# Altium PCB CR00041.PcbDoc
Units mm, origin at the board's own origin, x right, y up, seen from the top; angles counter-clockwise.
Board outline 18 x 19 mm, 2 copper layers (L 01 (Top), L 02), stack 1.506 mm thick; 14 components, 44 nets, 102 pads, 30 vias.
Unrouted connection lines stored in the file: 1.
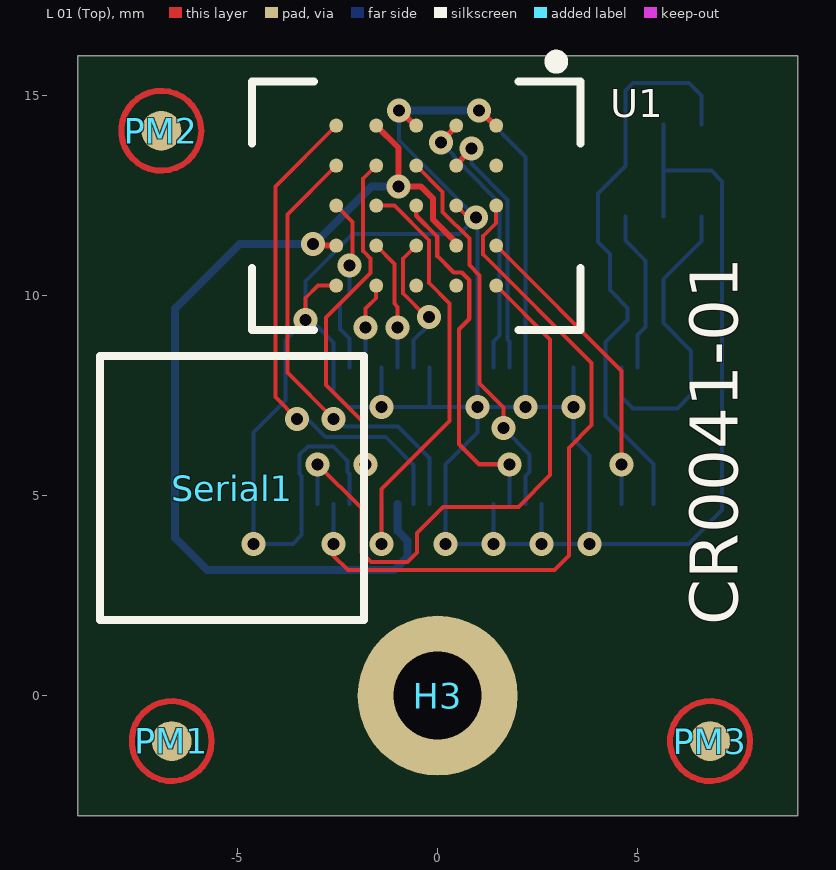
[diagram p0: L 01 (Top) view]
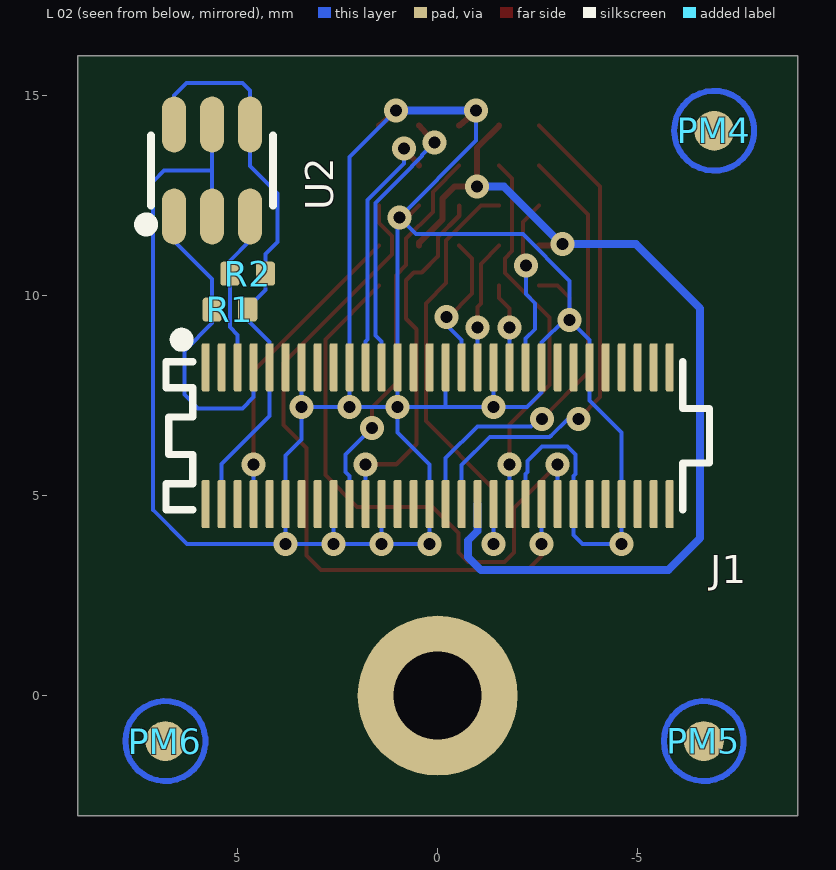
[diagram p1: L 02 view, seen from below]

## Layer stack, top to bottom
Top Solder: solder mask 0.0102, Solder Resist, Dk 3.5
L 01 (Top): signal copper 0.053
Dielectric1: core 1.4, FR-4, Dk 4.2
L 02: signal copper 0.053
Bottom Solder: solder mask 0.0102, Solder Resist, Dk 3.5

## Board outline
-9,-3 -9,16 9,16 9,-3

## Design rules (kind name [scope] priority, off if disabled: settings)
BoardOutlineClearance [All] p1: gap=0 except(0.5: Arc-OutlineEdge Track-OutlineEdge SMDPad-OutlineEdge THPad-OutlineEdge Via-OutlineEdge Fill-OutlineEdge Poly-OutlineEdge Region-OutlineEdge)
Clearance "HV Clearance" [(InNetClass('HV') AND InPolygon)] p1: gap=0.3
Clearance Clearance_ToUnplatedHole [IsPad and ( (HoleSize = 1.5) or (HoleSize = 3.25) ) vs (IsVia or IsTrack OR InPoly)] p2: gap=0.2
Clearance Clearance_DiffPair [(InDifferentialPairClass('All Differential Pairs')) vs (InPolygon)] p3: gap=0.3
Clearance Clearance_PolyToPoly [(InPolygon) vs InNamedPolygon('L01_U1_IN') or    InNamedPolygon('L01_U1_OUT') or InNamedPolygon('L01_U1_PGND')   or InNamedPolygon('L01_U2_IN') or    InNamedPolygon('L01_U2_OUT') or InNamedPolygon('L01_U2_PGND')] p4: gap=0.2
Clearance Clearance_Polygon [(InPolygon)] p5: gap=0.2 except(0.7: Poly-Poly)
Clearance [All] p6: gap=0.125 except(0.1: Track-Track Track-SMDPad Track-Via SMDPad-Via)
ComponentClearance ComponentClearance_logo [(HasFootprint('LOGO PRINT') or HasFootprint('FIDU-DOT - small'))] p1: gap=-0.05 collisioncheckmode=3 verticalgap=-0.1 showdistances=FALSE
ComponentClearance [All] p2: gap=-0.05 collisioncheckmode=3 verticalgap=0.254 showdistances=FALSE
DiffPairsRouting DiffPairsRouting_Under_FPGA [TouchesRoom('Room_MAX10')and InNetClass('Diff_IO')] p1: maxlimit=0.16 minlimit=0.16 mostfreqgap=0.16 toplayer_minwidth=0.1 toplayer_maxwidth=0.11 toplayer_prefwidth=0.11 bottomlayer_minwidth=0.1 bottomlayer_maxwidth=0.11 bottomlayer_prefwidth=0.11 maxuncoupledlength=15
DiffPairsRouting [InNetClass('Diff_IO') and not TouchesRoom('Room_MAX10')] p2: maxlimit=0.16 minlimit=0.16 mostfreqgap=0.16 toplayer_minwidth=0.11 toplayer_maxwidth=0.11 toplayer_prefwidth=0.11 bottomlayer_minwidth=0.11 bottomlayer_maxwidth=0.11 bottomlayer_prefwidth=0.11 maxuncoupledlength=2
FabricationTestPointUsage TestPointUsage [All] p1: valid=0 allowmultiple=FALSE
FabricationTestpoint Testpoint [All] p1: side=3 testpointundercomponent=TRUE minsize=1.016 maxsize=2.54 preferedsize=1.524 minholesize=0 maxholesize=1.016 preferedholesize=0.813 testpointgrid=0.025 allowsidetop=TRUE allowsidebottom=TRUE usegrid=TRUE gridtolerance=0
HoleSize [All] p1: absolutevalues=TRUE maxlimit=5 minlimit=0.2 maxpercent=80.000 minpercent=20.000
MinimumAnnularRing [All] p1: minimumring=0.15
MinimumSolderMaskSliver [All] p1: minsoldermaskwidth=0.1
PlaneClearance [All] p1: clearance=0.4
PlaneConnect [All] p1: planeconnectstyle=Direct reliefexpansion=0.508 reliefentries=4 reliefconductorwidth=0.254 reliefairgap=0.254
PolygonConnect PolygonConnect_6 [All vs IsNamedPolygon('L01_U1_PGND')] p1: connectstyle=Direct reliefconductorwidth=0.254 reliefentries=4 polygonreliefangle="90 Angle" airgapwidth=0.254
PolygonConnect PolygonConnect_7 [All vs IsNamedPolygon('L01_U1_IN')] p2: connectstyle=Direct reliefconductorwidth=0.254 reliefentries=4 polygonreliefangle="90 Angle" airgapwidth=0.254
PolygonConnect PolygonConnect_8 [All vs IsNamedPolygon('L01_U1_OUT')] p3: connectstyle=Direct reliefconductorwidth=0.254 reliefentries=4 polygonreliefangle="90 Angle" airgapwidth=0.254
PolygonConnect [All] p4: connectstyle=Direct reliefconductorwidth=0.254 reliefentries=4 polygonreliefangle="90 Angle" airgapwidth=0.254
RoutingCorners [All] p1: cornerstyle=Round minsetback=2 maxsetback=2
RoutingVias [All] p1: holewidth=0.3 width=0.6 viastyle="Through Hole" minholewidth=0.2 minwidth=0.5 maxholewidth=1 maxwidth=3
SMDNeckDown SMDNeckDown_Current_R [(InComponent('R22') or ( InComponent('R28'))) and IsPad] p1: percent=105.000
SMDNeckDown [isPad] p2: percent=80.000
SilkToSilkClearance [All] p1: silktosilkclearance=0.025
SilkToSolderMaskClearance SilkscreenOverComponentPads [IsPad] p1: minsilkscreentomaskgap=0.01 clearancetoexposedcopper=TRUE
SolderMaskExpansion SolderMaskExpansion_VIA [(IsVia)] p1: expansion=-0.15
SolderMaskExpansion [All] p2: expansion=0
Width [All] p1: maxlimit=3 minlimit=0.1 preferedwidth=0.1 minimp=50.000000 maximp=50.000000 favimp=50.000000 checkconnectedcopper=TRUE
19 further rules are at their usual default settings.

## Classes and differential pairs
component class CR00041: PM1 PM2 PM3 PM4 PM5 PM6 Serial1
component class CRUVI: H3 J1 R1 R2 SNAP1 U1 U2
differential pair CLK: +CLK_P -CLK_N

## Components (designator, comment, footprint, x,y, rotation, side; value= is the part's Value field where it differs from the comment)
H3 "Mount.Hole 2mm" MHole2_2mm 0,0 r0 top locked
J1 "ST4-30-1.50-L-D-P-TR" ST4-30-1_50-L-D 0,6.5 r180 bottom locked
PM1 "FIDU-DOT - small" "FIDU-DOT - small" -6.652,-1.135 r0 top
PM2 "FIDU-DOT - small" "FIDU-DOT - small" -6.911,14.124 r0 top
PM3 "FIDU-DOT - small" "FIDU-DOT - small" 6.808,-1.135 r90 top
PM4 "FIDU-DOT - small" "FIDU-DOT - small" -6.911,14.124 r180 bottom
PM5 "FIDU-DOT - small" "FIDU-DOT - small" -6.652,-1.135 r180 bottom
PM6 "FIDU-DOT - small" "FIDU-DOT - small" 6.808,-1.135 r90 bottom
R1 "4K7" RESC1005X40N 5.195,9.653 r0 bottom
R2 "4K7" RESC1005X40N 4.75,10.55 r0 bottom
Serial1 "Serialnumber 6,3 x 6.3mm" Serial_6.3x6.3mm -5.14,5.192 r0 top
SNAP1 "SNAP CRUVI 3x" CRUVI_3X_SNAP 22.86,25 r0 top locked
U1 "S26KS512SDPBHI00x" BGA25C100P5X5_800X600X120N -0.537,12.251 r270 top locked
U2 "24AA025E48T-I/OT" SOT95P280X145-6N 5.641,13.132 r90 bottom

## Footprints (in the part's own frame and the unit in brackets; to place one, negate y for a bottom-side part, rotate by r counter-clockwise, add the part's x,y. Pads: shape width x height; smd on the part's side, far side on the other; paste and mask are expansions set on the pad)
BGA25C100P5X5_800X600X120N [mm]
  round 0.35 smd: A1(-2,2) A2(-1,2) A3(0,2) A4(1,2) A5(2,2) B1(-2,1) B2(-1,1) B3(0,1) B4(1,1) B5(2,1) C1(-2,0) C2(-1,0) C3(0,0) C4(1,0) C5(2,0) D1(-2,-1) D2(-1,-1) D3(0,-1) D4(1,-1) D5(2,-1) E1(-2,-2) E2(-1,-2) E3(0,-2) E4(1,-2) E5(2,-2)
  silkscreen extent -3.75,-4.11 3.11,4.11, body extent -3.05,-4.05 3.05,4.05, height 1.21
CRUVI_3X_SNAP [mm]
"FIDU-DOT - small" [mm]
  round 1 smd paste-1: 0(0,0)
  L 01 (Top) circle w0.15: c0,0 r1
MHole2_2mm [mm]
  round 4 hole 2.2: 1(0,0)
RESC1005X40N [mm] "Vishay D0402 1 x 0.5mm (+/- 0.05), 0.2mm +/-0.1mm Kontakte"
  rrect33% 0.48x0.6 smd: 1(-0.445,0) 2(0.445,0)
  body extent -0.5,-0.25 0.5,0.25, height 0.35
Serial_6.3x6.3mm [mm]
  silkscreen extent -3.3,-3.3 3.3,3.3, body extent -3,-3 3,3, height 0.21
SOT95P280X145-6N [mm]
  oval 1.4x0.6 smd: 1(-1.15,0.95) 2(-1.15,0) 3(-1.15,-0.95) 4(1.15,-0.95) 5(1.15,0) 6(1.15,0.95)
  silkscreen extent -1.5,-1.53 0.87,1.8, body extent -1.35,-1.45 1.35,1.45, height 1.45
ST4-30-1_50-L-D [mm]
  rrect33% 0.2x1.2 smd: 1(-5.8,1.71) 2(-5.8,-1.71) 3(-5.4,1.71) 4(-5.4,-1.71) 5(-5,1.71) 6(-5,-1.71) 7(-4.6,1.71) 8(-4.6,-1.71) 9(-4.2,1.71) 10(-4.2,-1.71) 11(-3.8,1.71) 12(-3.8,-1.71) 13(-3.4,1.71) 14(-3.4,-1.71) 15(-3,1.71) 16(-3,-1.71) 17(-2.6,1.71) 18(-2.6,-1.71) 19(-2.2,1.71) 20(-2.2,-1.71) 21(-1.8,1.71) 22(-1.8,-1.71) 23(-1.4,1.71) 24(-1.4,-1.71) 25(-1,1.71) 26(-1,-1.71) 27(-0.6,1.71) 28(-0.6,-1.71) 29(-0.2,1.71) 30(-0.2,-1.71) 31(0.2,1.71) 32(0.2,-1.71) 33(0.6,1.71) 34(0.6,-1.71) 35(1,1.71) 36(1,-1.71) 37(1.4,1.71) 38(1.4,-1.71) 39(1.8,1.71) 40(1.8,-1.71) 41(2.2,1.71) 42(2.2,-1.71) 43(2.6,1.71) 44(2.6,-1.71) 45(3,1.71) 46(3,-1.71) 47(3.4,1.71) 48(3.4,-1.71) 49(3.8,1.71) 50(3.8,-1.71) 51(4.2,1.71) 52(4.2,-1.71) 53(4.6,1.71) 54(4.6,-1.71) 55(5,1.71) 56(5,-1.71) 57(5.4,1.71) 58(5.4,-1.71) 59(5.8,1.71) 60(5.8,-1.71)
  silkscreen extent -6.79,-1.85 6.79,2.55, body extent -6.87,-2 6.71,2, height 3.56

## Part data
H3: library part 27273
J1: library part 29686
PM1 PM2 PM3 PM4 PM5 PM6: library part 22905, "FIDU-DOT - SMALL 1mm"
R1 R2: library part 22585, "WID SMD 4K7 1% 0,063W BF 1005 (0402)"
Serial1: library part 26753
SNAP1: library part 29977, "SNAP for CRUVI 3x"
U1: library part 26436, "S26KS512SDPBHI00x 1.8V"
U2: library part 26249

## Via types
v1: diameter 0.6, hole 0.3, L 01 (Top) to L 02, 30 vias

## Nets (pads, with @x,y where several pads share a name; then routed paths per layer and width w, separated by ;. In a path a pad name is that pad's centre, name@x,y a point inside that pad or via, vN(x,y) a via of type N, cw(c..) or ccw(c..) an arc to the next point about the centre after c; other vN are vias at no path point)
+3.3V_D: J1.4 J1.9 R1.1 R2.1 U2.4 U2.6 | length 14.5
  L 02 w0.1: J1.4 5.4,5.789 4.2,6.989 J1.9 4.2,8.838 4.75,9.388 R1.1 4.75,9.698 4.305,10.143 R2.1 4.305,11.047 4.009,11.344 4.009,12.561 4.691,13.243 U2.4 4.691,15.131 4.878,15.318 6.276,15.318 6.591,15.003 U2.6
+5.0V_D: J1.60
A0_N: J1.16
A0_P: J1.14
A2_N: J1.28
A2_P: J1.26
B0_N: J1.17
B0_P: J1.15
B2_N: J1.29
B2_P: J1.27
B5_N: J1.47
B5_P: J1.45
CLK_N: J1.23 U1.B1 | length 6.9
  L 01 (Top) w0.15: v1@0.043,13.831 0.076,13.847 0.117,13.867 0.137,13.876 U1.B1
  L 02 w0.1: v1(0.087,13.826) 0.389,13.524 0.389,13.489 0.639,13.239 0.639,13.225 1.55,12.315 1.55,9.01 1.4,8.86 J1.23
CLK_P: J1.21 U1.B2 | length 6.5
  L 01 (Top) w0.15: U1.B2 0.789,13.626 0.809,13.635 0.849,13.655 v1@0.883,13.671
  L 02 w0.1: v1(0.839,13.676) 0.839,13.308 1.75,12.398 1.75,8.91 1.8,8.86 J1.21
CS0: J1.20 U1.C2 | length 9.7
  L 01 (Top) w0.1: U1.C2 0.12,12.594 0.12,12.098 0.789,11.428 0.789,10.764 1.042,10.511 1.042,7.81 1.641,7.211 v1(1.641,6.689)
  L 02 w0.1: v1(1.641,6.689) 2.3,6.03 2.3,5.598 2.2,5.498 J1.20
CS1: J1.44 U1.A3 | length 17.7
  L 01 (Top) w0.1: v1(-2.6,3.795) -2.6,3.497 -2.248,3.145 2.917,3.145 3.282,3.51 3.282,6.198 3.85,6.765 3.85,8.324 1.138,11.036 1.138,11.489 1.463,11.814 U1.A3
  L 02 w0.1: v1(-2.6,3.795) J1.44
D0: J1.38 U1.D3 | length 11.2
  L 01 (Top) w0.1: U1.D3 -1.078,12.251 -0.212,11.386 -0.212,10.321 0.299,9.809 0.299,6.87 -1.4,5.17 v1(-1.4,3.795)
  L 02 w0.1: v1(-1.4,3.795) J1.38
D1: J1.40 U1.D2 | length 9.5
  L 01 (Top) w0.1: v1(-1.8,5.785) -1.8,6.784 -2.788,7.773 -2.788,9.459 -1.676,10.572 -1.676,10.93 -1.862,11.116 -1.862,12.926 U1.D2
  L 02 w0.1: J1.40 v1(-1.8,5.785)
D2: J1.33 U1.C4 | length 3.6
  L 01 (Top) w0.1: U1.C4 -0.862,10.926 -0.862,10.05 v1@-0.252,9.439
  L 02 w0.1: J1.33 -0.6,8.892 -0.223,9.269 v1(-0.223,9.468)
D3: J1.35 U1.D4 | length 3.3
  L 01 (Top) w0.1: U1.D4 -1.084,10.798 -1.084,9.807 -1,9.723 v1(-1,9.205)
  L 02 w0.1: J1.35 v1(-1,9.205)
D4: J1.39 U1.D5 | length 2.1
  L 01 (Top) w0.1: v1(-1.8,9.205) -1.8,9.685 -1.537,9.947 U1.D5
  L 02 w0.1: J1.39 v1(-1.8,9.205)
D5: J1.41 U1.E3 | length 4.5
  L 01 (Top) w0.1: U1.E3 -2.127,11.841 v1@-2.127,10.761
  L 02 w0.1: v1@-2.287,10.681 v1(-2.207,10.761) -2.207,10.041 -2.438,9.81 -2.438,9.167 -2.2,8.93 J1.41
D6: J1.32 U1.E2 | length 11.3
  L 01 (Top) w0.1: v1(-2.607,6.924) -3.761,8.078 -3.761,12.027 U1.E2
  L 02 w0.1: v1(-2.607,6.924) -2.52,6.924 -2.329,6.733 -0.994,6.733 -0.2,5.939 J1.32
D7: J1.34 U1.E1 | length 12.6
  L 01 (Top) w0.1: v1(-3.515,6.921) -4.061,7.467 -4.061,12.727 U1.E1
  L 02 w0.1: v1(-3.515,6.921) -3.251,6.921 -2.825,6.494 -2.814,6.494 -2.794,6.474 -1.307,6.474 -0.6,5.767 J1.34
GND: H3.1 J1.12 J1.13 J1.18 J1.19 J1.24 J1.25 J1.30 J1.31 J1.37 J1.42 J1.43 J1.48 J1.49 J1.54 U1.A1 U1.B3 U1.C1 U1.E5 U2.2 U2.5 | length 79.2
  L 01 (Top) w0.1: v1(-3.3,9.398) -3.3,9.949 -2.998,10.251 U1.E5 ; U1.B3 v1@0.855,11.859
  L 01 (Top) w0.15: v1@-0.957,14.671 -0.941,14.638 -0.921,14.597 -0.912,14.577 U1.C1 ; v1@1.043,14.671 1.059,14.638 1.079,14.597 1.088,14.577 U1.A1
  L 02 w0.1: J1.42 -2.2,5.548 -2.25,5.598 -2.25,5.873 -2.612,6.235 -3.249,6.235 -3.45,6.033 -3.45,5.548 -3.4,5.498 J1.48 -3.4,4.013 -3.617,3.795 v1(-4.6,3.795) J1.54 -4.6,6.578 -3.8,7.378 J1.49 -3.8,8.897 v1(-3.3,9.398) ; J1.37 v1(-1.4,7.215) ; v1(-0.962,14.627) -0.962,13.876 v1(0.955,11.959) ; J1.31 -0.2,7.215 ; v1(1.038,14.627) 2.2,13.466 J1.19 v1(2.2,7.215) ; J1.24 v1(1.4,3.795) ; J1.18 v1(2.6,3.795) ; J1.13 v1(3.4,7.215) ; U2.2 5.641,13.132 ; U2.5 5.641,13.132 ; v1(-3.3,9.398) -3.209,9.398 -3.189,9.418 -2.6,8.829 J1.43 -2.6,7.584 -2.231,7.215 v1(-1.4,7.215) ; v1(-3.3,9.398) -3.3,10.373 -2.127,11.546 0.542,11.546 v1(0.955,11.959) ; v1(-1.4,7.215) -0.2,7.215 ; -0.2,7.215 v1(1,7.215) ; v1(0.955,11.959) 1,11.914 J1.25 v1(1,7.215) ; v1(1,7.215) v1(2.2,7.215) ; v1(1,7.215) 1,6.582 0.2,5.782 J1.30 v1(0.2,3.795) v1(1.4,3.795) ; v1(1.4,3.795) v1(2.6,3.795) ; v1(2.2,7.215) v1(3.4,7.215) ; v1(2.6,3.795) v1(3.8,3.795) ; v1(3.4,7.215) 3.4,6.4 3.8,6 J1.12 v1(3.8,3.795) ; v1(3.8,3.795) 6.266,3.795 7.112,4.642 7.112,12.861 6.842,13.132 5.641,13.132
  L 02 w0.2: v1(-0.962,14.627) v1(1.038,14.627)
HSI: J1.10
HSIO: J1.2
HSO: J1.6
INT: J1.46 U1.A5 | length 14.9
  L 01 (Top) w0.1: v1(-3,5.785) -1.906,4.69 -1.906,3.585 -1.666,3.345 -0.752,3.345 -0.522,3.575 -0.522,4.066 0.129,4.718 2.014,4.718 2.812,5.515 2.812,8.902 U1.A5
  L 02 w0.1: J1.46 v1(-3,5.785)
JTAGEN: J1.57
REFCLK: J1.11
RESET: J1.8 U1.A4 | length 7.8
  L 01 (Top) w0.1: U1.A4 4.6,8.114 v1(4.6,5.785)
  L 02 w0.1: J1.8 v1(4.6,5.785)
RFU1: J1.1
RWDS: J1.22 U1.C3 | length 9.2
  L 01 (Top) w0.11: U1.C3 -0.537,12.001 -0.007,11.471 -0.007,10.99 0.402,10.581 0.6,10.581 0.793,10.388 0.793,9.421 0.531,9.159 0.531,6.287 1.033,5.785 v1(1.8,5.785)
  L 02 w0.1: J1.22 v1(1.8,5.785)
SMB_ALERT: J1.3
SMB_SCL: J1.7 R1.2 U2.1 | length 7.9
  L 02 w0.1: J1.7 4.6,7.463 4.882,7.181 5.992,7.181 6.335,7.525 6.335,8.617 5.64,9.313 R1.2 5.64,10.423 6.591,11.373 U2.1
SMB_SDA: J1.5 R2.2 U2.3 | length 4.1
  L 02 w0.1: U2.3 4.691,11.378 5.195,10.874 R2.2 5.195,9.215 5,9.02 J1.5
TCK: J1.59
TDI: J1.51
TDO: J1.53
TMS: J1.55
USB_N: J1.58
USB_P: J1.56
VADJ: J1.36 U1.B4 U1.D1 U1.E4 | length 25.1
  L 01 (Top) w0.15: v1(-3.124,11.287) -3.088,11.251 U1.E4 ; U1.D1 -0.981,13.695 v1(-0.981,12.729) -0.416,12.729 -0.122,12.435 -0.122,11.911 0.463,11.326 U1.B4
  L 02 w0.2: J1.36 -1,4.123 -0.752,3.875 -0.752,3.471 -1.077,3.145 -5.763,3.145 -6.562,3.944 -6.562,9.682 -4.957,11.287 v1(-3.124,11.287) -3.124,11.257 -1.653,12.729 v1(-0.981,12.729)
pads on no net: J1.50 J1.52 PM1.0 PM2.0 PM3.0 PM4.0 PM5.0 PM6.0 U1.A2 U1.B5 U1.C5

## Silkscreen, mask and mechanical layers (free items; w line width, h text height)
Top Overlay:
  text "CR0041-01" at 7.496,1.761 h1.2 r90
Bottom Overlay:
  text "C" at -14.202,14.336 h10 r180
  text "W" at -15.853,-1.054 h10
Dim-Top-GM1:
  text "Top View" at -8.458,20.515 h2
Dim-Bot-GM2:
  text "Top View" at -8.458,20.515 h2
PCB-Outline-GM6:
  the board outline again, w0.01
Assembly-Top-GM13:
  text "'.Project'-'.Revision'-'.VariantName'" at -7.891,24.951 h1.5
  text "Variant name:" at -23.891,24.88 h1.5
  text "Top View" at -8.458,20.519 h2
Assembly-Bot-GM14:
  text "'.Project'-'.Revision'-'.VariantName'" at 4.656,24.951 h1.5
  text "Variant name:" at 20.656,24.88 h1.5
  text "Bottom View" at 9.083,20.443 h2

## Dimensions
0,0 to 9,-3 on Dim-Top-GM1
1,6.5 to 0,0 on Dim-Top-GM1
9,16 to 9,-3 on Dim-Top-GM1
-9,-3 to 9,-3 on Dim-Top-GM1

## Text inside footprints (layer, text, board x,y; h text height)
J1: Assembly-Bot-GM14 "1" at 5.717,7.5 h0.5; Assembly-Bot-GM14 "2" at 5.8,5 h0.5; Assembly-Bot-GM14 "60" at -4.9,5 h0.5; Assembly-Bot-GM14 "59" at -4.9,7.5 h0.5
Serial1: Assembly-Top-GM13 "SerialNr" at -7.555,8.584 h0.7
SNAP1: TDev-Notes-Top-GM11 "LS C connector" at -6.2,22.725 h0.7; TDev-Notes-Top-GM11 "LS B connector" at 16.66,22.75 h0.7; TDev-Notes-Top-GM11 "LS A connector" at 39.52,22.75 h0.7; TDev-Notes-Top-GM11 "HS C connector" at 37.82,9.9 h0.7; TDev-Notes-Top-GM11 "HS B connector" at 14.96,9.9 h0.7; TDev-Notes-Top-GM11 "HS A connector" at -7.9,9.9 h0.7; TDev-Notes-Top-GM11 "11" at -5.86,24 h0.7; TDev-Notes-Top-GM11 "12" at -5.86,29.1 h0.7; TDev-Notes-Top-GM11 "2" at 5.24,29.1 h0.7; TDev-Notes-Top-GM11 "1" at 5.44,24 h0.7; TDev-Notes-Top-GM11 "60" at -7.4,3.8 h0.7; TDev-Notes-Top-GM11 "59" at -7.4,8.6 h0.7; TDev-Notes-Top-GM11 "1" at 6.4,8.6 h0.7; TDev-Notes-Top-GM11 "2" at 6.3,3.8 h0.7; TDev-Notes-Top-GM11 "1" at 28.3,24 h0.7; TDev-Notes-Top-GM11 "2" at 28.1,29.1 h0.7; TDev-Notes-Top-GM11 "12" at 17,29.1 h0.7; TDev-Notes-Top-GM11 "11" at 17,24 h0.7; TDev-Notes-Top-GM11 "2" at 29.16,3.8 h0.7; TDev-Notes-Top-GM11 "1" at 29.26,8.6 h0.7; TDev-Notes-Top-GM11 "59" at 15.46,8.6 h0.7; TDev-Notes-Top-GM11 "60" at 15.46,3.8 h0.7; TDev-Notes-Top-GM11 "60" at 38.32,3.8 h0.7; TDev-Notes-Top-GM11 "59" at 38.32,8.6 h0.7; TDev-Notes-Top-GM11 "1" at 52.12,8.6 h0.7; TDev-Notes-Top-GM11 "2" at 52.02,3.8 h0.7; TDev-Notes-Top-GM11 "11" at 39.86,24 h0.7; TDev-Notes-Top-GM11 "12" at 39.86,29.1 h0.7; TDev-Notes-Top-GM11 "2" at 50.96,29.1 h0.7; TDev-Notes-Top-GM11 "1" at 51.16,24 h0.7